# Altium PCB eta2858_evb.PcbDoc
Units mm, origin at the board's own origin, x right, y up, seen from the top; angles counter-clockwise.
Board outline 49.5 x 36.8 mm, 2 copper layers (Top Layer, Bottom Layer); 26 components, 11 nets, 65 pads, 286 vias.
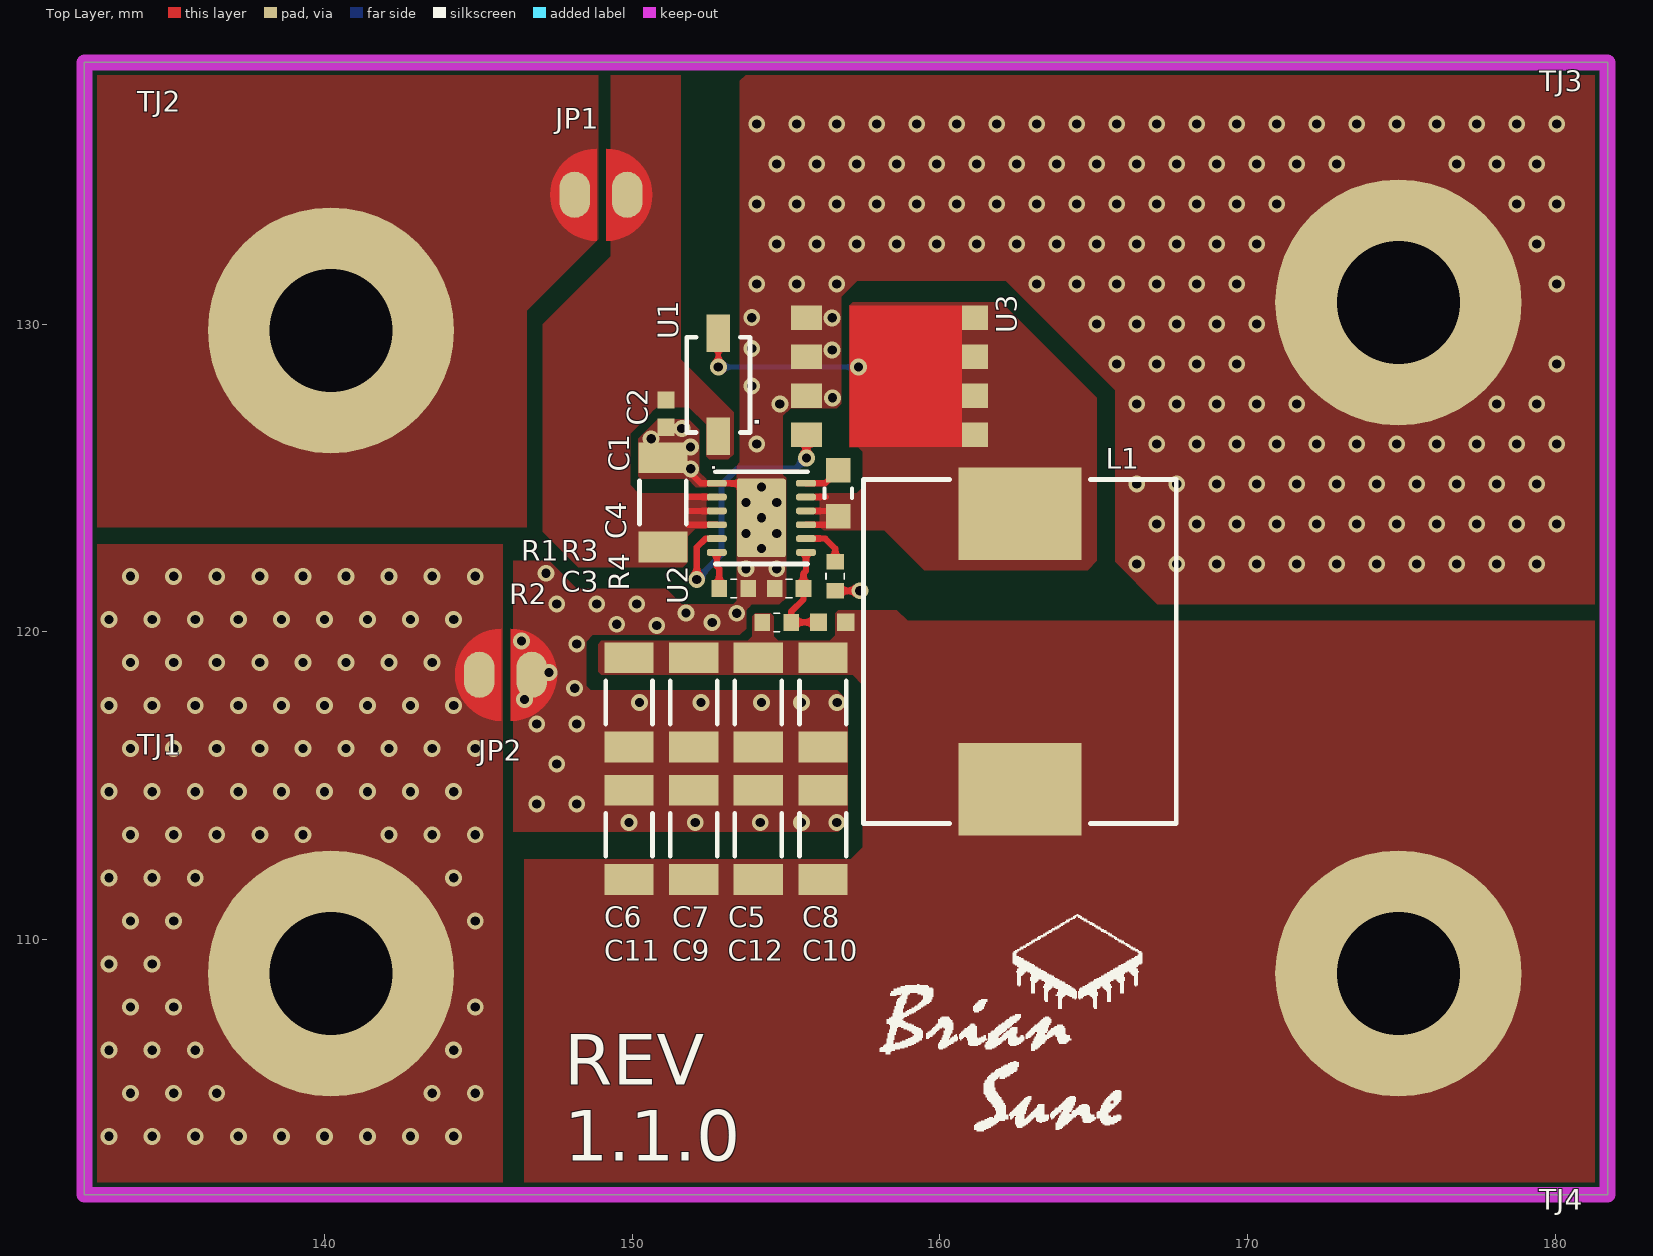
[diagram p0: Top Layer view]
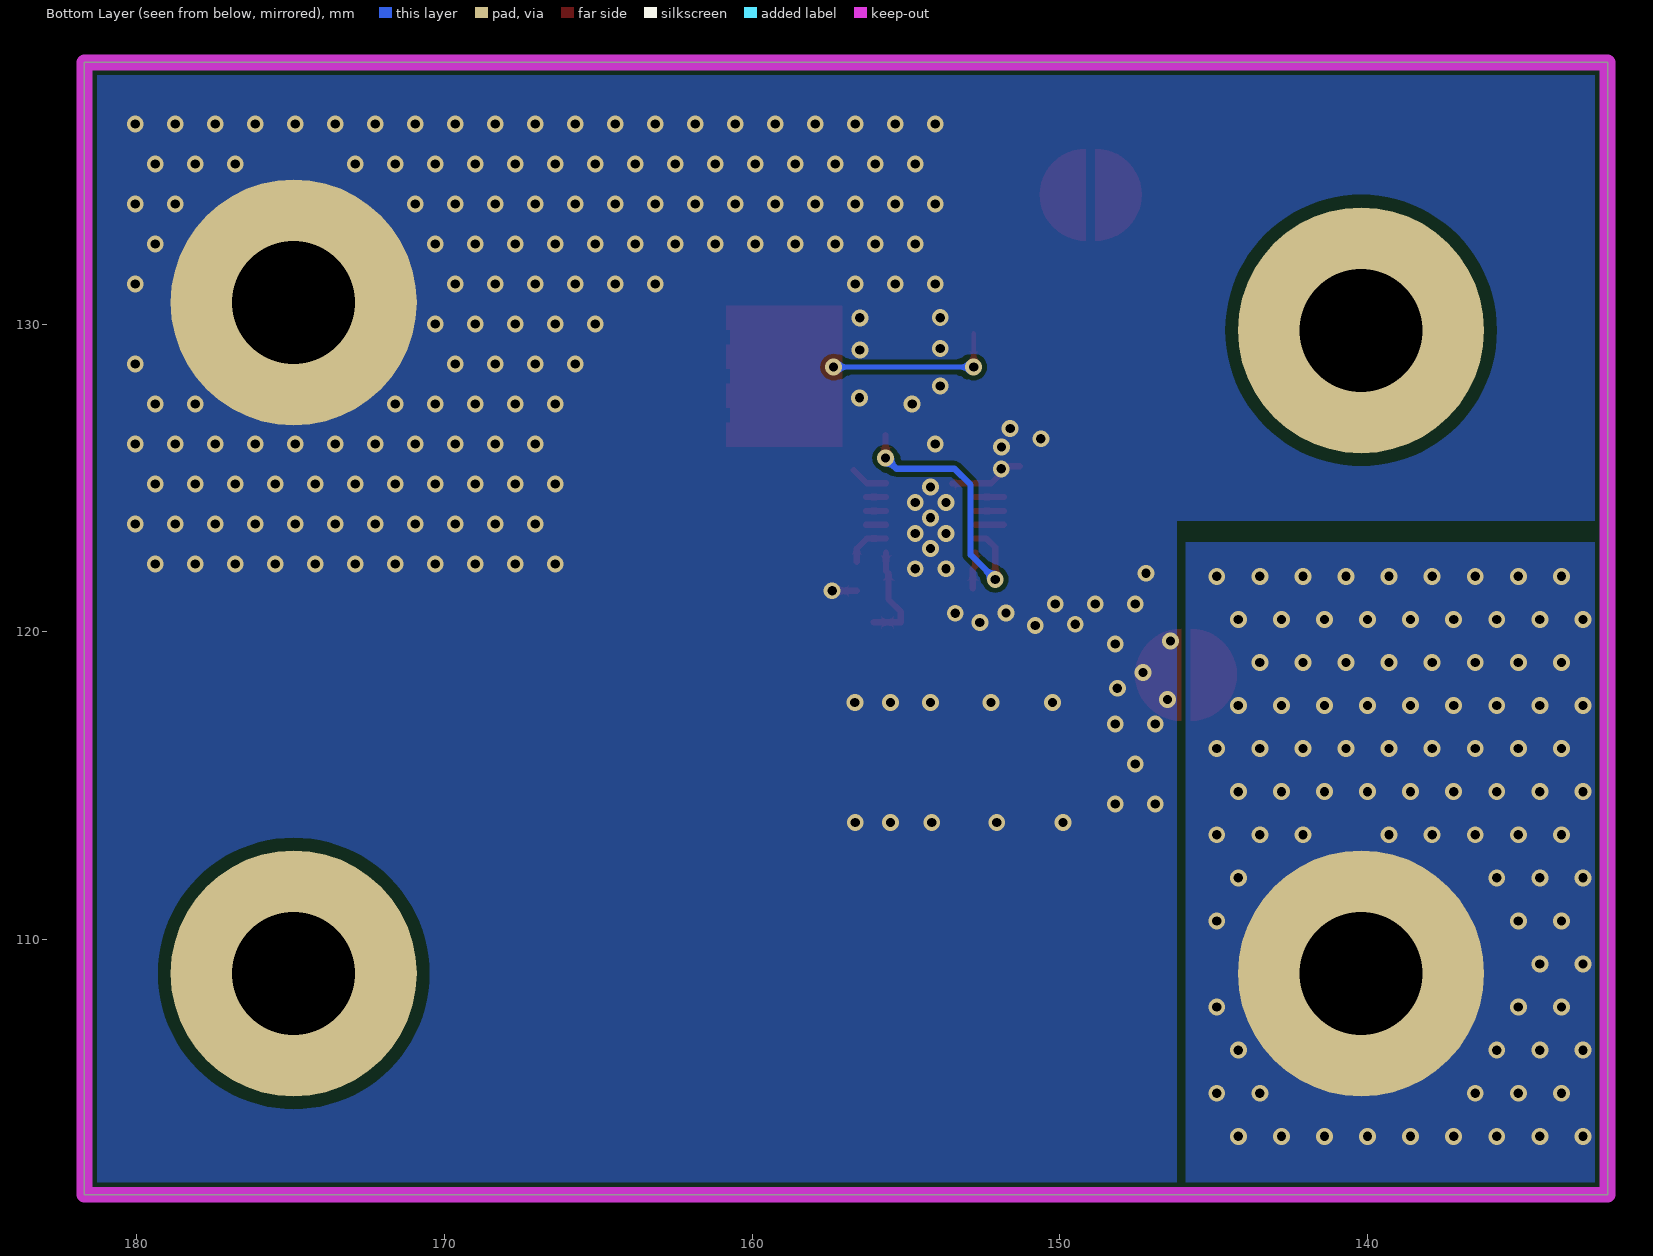
[diagram p1: Bottom Layer view, seen from below]
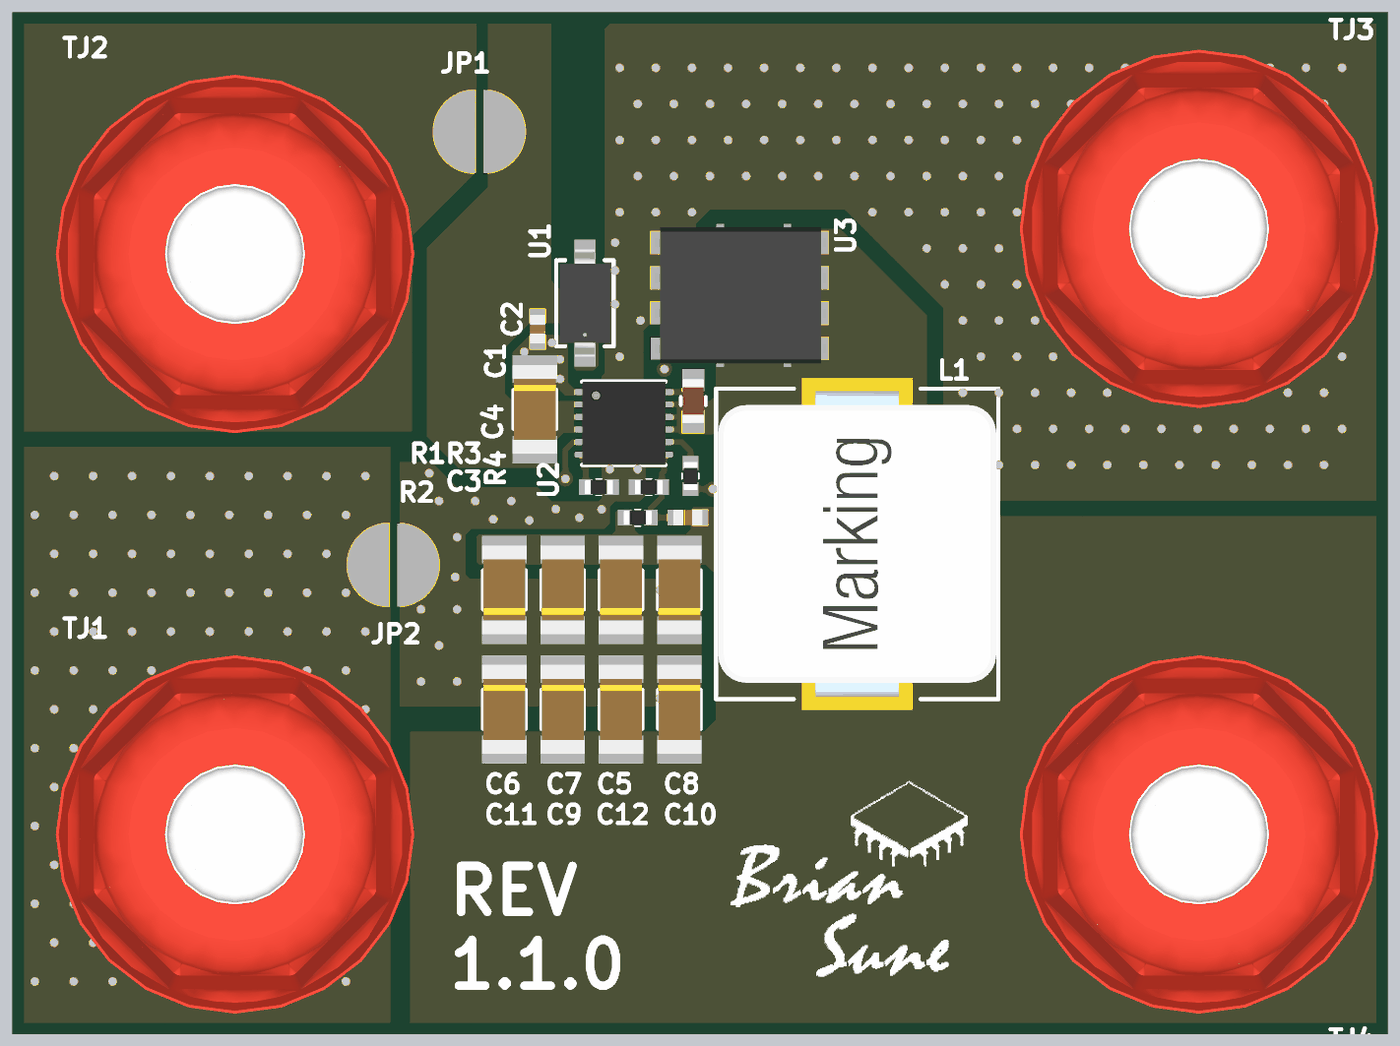
[diagram p2: 3D render of the assembled board from above, using the file's embedded part models]

## Layer stack, top to bottom
Top Solder: solder mask 0.0102, Solder Resist, Dk 3.5
Top Layer: signal copper 0.0356
Dielectric 1: dielectric 0.32, FR-4, Dk 4.8
Bottom Layer: signal copper 0.0356
Bottom Solder: solder mask 0.0102, Solder Resist, Dk 3.5

## Board outline
132.2,101.7 181.7,101.7 181.7,138.5 132.2,138.5

## Design rules (kind name [scope] priority, off if disabled: settings)
Clearance [All] p1: gap=0.152 ignorepadtopadclearanceinfootprint=FALSE except(0: Arc-Hole Track-Hole SMDPad-Hole THPad-Hole Via-Hole Fill-Hole Poly-Hole Region-Hole Text-Hole; 0.203: SMDPad-Poly SMDPad-Region THPad-Region Poly-Region; 0.406: THPad-Poly)
ComponentClearance [All] p1: gap=0.5 collisioncheckmode=3 verticalgap=0.254 showdistances=FALSE
DiffPairsRouting [All] p1: maxlimit=0.254 minlimit=0.152 mostfreqgap=0.203 toplayer_minwidth=0.152 toplayer_maxwidth=0.381 toplayer_prefwidth=0.203 bottomlayer_minwidth=0.152 bottomlayer_maxwidth=0.381 bottomlayer_prefwidth=0.203 maxuncoupledlength=12.7
Height [All] p1: minheight=0 maxheight=40 prefheight=12.7
HoleSize [All] p1: absolutevalues=TRUE maxlimit=6 minlimit=0.025 maxpercent=80.000 minpercent=20.000
HoleToHoleClearance [All] p1: gap=0.076 allowstackedmicrovias=TRUE
MinimumSolderMaskSliver [All] p1: minsoldermaskwidth=0.025
PolygonConnect [All] p1: connectstyle=Direct reliefconductorwidth=0.305 reliefentries=4 polygonreliefangle="90 Angle" airgapwidth=0.203
RoutingVias [All] p1: holewidth=0.4 width=0.6 viastyle="Through Hole" minholewidth=0.3 minwidth=0.5 maxholewidth=2.8 maxwidth=3
SilkToSilkClearance [All] p1: silktosilkclearance=0.076
SilkToSolderMaskClearance [IsPad] p1: minsilkscreentomaskgap=0.025 clearancetoexposedcopper=TRUE
SolderMaskExpansion [All] p1: expansion=0.025
Width [All] p1: maxlimit=1.016 minlimit=0.152 preferedwidth=0.254
22 further rules are at their usual default settings.

## Components (designator, comment, footprint, x,y, rotation, side; value= is the part's Value field where it differs from the comment)
C1 "10uF" CAP_CL31_SAM 151,124.2 r270 top
C2 "100nF" CAP_CC0402_YAG 151.1,127.09 r90 top
C3 "100pF" CAP_CC0402_YAG 156.5,120.305 r0 top
C4 "1uF" *CAPC1608X90 156.7,124.5 r90 top
C5 "10uF" CAP_CL31_SAM 154.1,113.4 r270 top
C6 "10uF" CAP_CL31_SAM 149.9,113.4 r270 top
C7 "10uF" CAP_CL31_SAM 152,113.4 r270 top
C8 "10uF" CAP_CL31_SAM 156.2,113.4 r270 top
C9 "10uF" CAP_CL31_SAM 152,117.7 r90 top
C10 "10uF" CAP_CL31_SAM 156.2,117.7 r90 top
C11 "10uF" CAP_CL31_SAM 149.9,117.7 r90 top
C12 "10uF" CAP_CL31_SAM 154.1,117.7 r90 top
JP1 "J?" JP 149,134.2 r0 top
JP2 "J?" JP 145.9,118.6 r0 top
L1 "4.7uH" IND_SRP1040VA-1R5M_BRN 162.6,119.356 r90 top
R1 "30k" 0402_PAN 153.3,121.4 r180 top
R2 "220k" 0402_PAN 154.7,120.3 r180 top
R3 "30k" 0402_PAN 155.1,121.4 r0 top
R4 "30k" 0402_PAN 156.6,121.8 r90 top
TJ1 "73098-0" 73098 140.208,108.892 r0 top
TJ2 "73098-0" 73098 140.208,129.794 r0 top
TJ3 "73098-0" 73098 174.9,130.7 r0 top
TJ4 "73098-0" 73098 174.9,108.892 r0 top
U1 "SS14FL" SOD-123_ONS 152.8,128.021 r90 top
U2 "ETA2858D3M" DFN3x3-12 154.2,123.7 r270 top
U3 "NMOS" SMT_009LCG-7_DIO 158.4,128.3 r0 top

## Footprints (in the part's own frame and the unit in brackets; to place one, negate y for a bottom-side part, rotate by r counter-clockwise, add the part's x,y. Pads: shape width x height; smd on the part's side, far side on the other; paste and mask are expansions set on the pad)
0402_PAN [mil]
  rect 20x22 smd paste+0 mask+0: 1(-18.5,0) 2(18.5,0)
  silkscreen extent -4,-12 4,12, body extent -20,-10 20,10, height 14
73098 [mm]
  round 8 hole 4: T1(0,0)
  body extent -6.45,-6.45 6.45,6.45, height 29.89
*CAPC1608X90 [mm]
  rect 0.8x0.8 smd: 1(-0.75,0) 2(0.75,0)
  silkscreen extent -0.15,-0.45 0.15,0.45, body extent -0.8,-0.4 0.8,0.4, height 0.6
CAP_CC0402_YAG [mil]
  rect 22x22 smd: 1(-17.5,0) 2(17.5,0)
  body extent -21,-11 21,11, height 22
CAP_CL31_SAM [mm]
  rect 1x1.6 smd paste+0 mask+0: 1(-1.45,0) 2(1.45,0)
  silkscreen extent -0.7,-0.76 0.7,0.76, body extent -1.6,-0.8 1.6,0.8, height 1
DFN3x3-12 [mm]
  rrect70% 0.22x0.65 smd: 1(-1.125,-1.45) 2(-0.675,-1.45) 3(-0.225,-1.45) 4(0.225,-1.45) 5(0.675,-1.45) 6(1.125,-1.45) 7(1.125,1.45) 8(0.675,1.45) 9(0.225,1.45) 10(-0.225,1.45) 11(-0.675,1.45) 12(-1.125,1.45)
  rrect10% 2.55x1.6 smd: 1(0,0)
  silkscreen extent -1.5,-1.5 1.5,1.5, body extent -1.5,-1.5 1.5,1.5, height 0.76
IND_SRP1040VA-1R5M_BRN [mm]
  rect 3x4 smd paste-1.753 mask+0: 1(-4.475,0) 2(4.475,0)
  silkscreen extent -5.59,-5.08 5.59,5.08, body extent -5.5,-5 5.5,5, height 3.85
JP [mm]
  oval 1x1.5 smd: 1(-0.868,0) 2(0.838,0)
  Top Layer region: -0.152,-1.5 -0.152,1.5 -0.158,1.5 -0.732,1.386 -1.218,1.061 -1.543,0.574 -1.658,0 -1.658,0 -1.543,-0.574 -1.218,-1.061 -0.732,-1.386 -0.158,-1.5 -0.158,-1.5
  Top Layer region: 0.152,1.5 0.152,-1.5 0.158,-1.5 0.732,-1.386 1.218,-1.061 1.543,-0.574 1.658,0 1.658,0 1.543,0.574 1.218,1.061 0.732,1.386 0.158,1.5 0.158,1.5
SMT_009LCG-7_DIO [mm]
  rect 1x0.8 smd: 1(-2.738,1.905) 2(-2.738,0.635) 3(-2.738,-0.635) 4(-2.738,-1.905)
  rect 0.85x0.8 smd: 5(2.738,-1.905) 6(2.738,-0.635) 7(2.738,0.635) 8(2.738,1.905)
  Top Layer region: 2.2,-2.3 2.454,-2.3 2.454,-1.5 2.2,-1.5
  Top Layer region: 2.2,-1.035 2.454,-1.035 2.454,-0.235 2.2,-0.235
  Top Layer region: 2.2,0.235 2.454,0.235 2.454,1.035 2.2,1.035
  Top Layer region: -1.338,-2.3 2.312,-2.3 2.312,2.3 -1.338,2.3
  Top Layer region: 2.454,2.3 2.2,2.3 2.2,1.5 2.454,1.5
  Top Layer region: -0.564,1.166 -0.564,1.166 -0.564,1.166 -0.564,1.166 -0.564,1.166 -0.564,1.166 -0.564,1.166 -0.564,1.166
  Top Layer region: -0.564,-1.166 -0.564,-1.166 -0.564,-1.166 -0.564,-1.166 -0.564,-1.166 -0.564,-1.166 -0.564,-1.166 -0.564,-1.166
  body extent -3.07,-2.57 3.08,2.58, height 1
SOD-123_ONS [mil]
  rect 48x30 smd paste+0 mask+0: 1(-66,0) 2(66,0)
  silkscreen extent -61,-41 61,41, body extent -76,-36 76,36, height 53

## Part data
C1 C5 C6 C7 C8 C9 C10 C11 C12: library part CL31B106KBHNNNE, "CL31B106KBHNNNE / Multilayer Ceramic Capacitors MLCC - SMD/SMT 10uF+/-10% 50V X7R 3 1206", Mfr.="Samsung Electro-Mechanics", ComponentLink1Description=mouser, ComponentLink1URL=https://www.mouser.hk/ProductDetail/Samsung-Electro-Mechanics/CL31B106KBHNNNE?qs=T0XSgvH75d4ZN8WrMi8xmQ%3D%3D, Mfr. No=CL31B106KBHNNNE
C2: library part GCM155R71H104ME02J, "GCM155R71H104ME02J / Multilayer Ceramic Capacitors MLCC - SMD/SMT", Mfr.="Murata Electronics", ComponentLink1Description=mouser, ComponentLink1URL=https://www.mouser.hk/ProductDetail/Murata-Electronics/GCM155R71H104ME02J?qs=QzBtWTOodeX25ZLBhHkqFQ%3D%3D, Mfr. No=GCM155R71H104ME02J
C3: library part GCM1555C1H101JA16D, "GCM1555C1H101JA16D / Multilayer Ceramic Capacitors MLCC - SMD/SMT 100PF 50V 5% 0402", Mfr.="Murata Electronics", ComponentLink1Description=mouser, ComponentLink1URL=https://www.mouser.hk/ProductDetail/Murata-Electronics/GCM1555C1H101JA16D?qs=QDXoN8f0aYJDrHLGHfBgVg%3D%3D, Mfr. No=GCM1555C1H101JA16D
C4: library part 0603F105M500NT, "1uF(105) ±20% 50V X7R 0603F105M500NT", Package="0603 Kemet", ComponentLink1Description=Taobao, ComponentLink1URL=https://item.taobao.com/item.htm?spm=a1z09.2.0.0.1e6b2e8dpr7A02&id=560896377413&_u=o10quk0k0a55, MF=KEMET, MP=C0603C104Z3VACTU, Price=None
JP1 JP2: library part J
L1: library part SRP1040VA-1R5M, "SRP1040VA-1R5M", Mfr_Name="Bourns Electronics", ComponentLink1Description=mouser, ComponentLink1URL=https://www.mouser.hk/ProductDetail/Bel-Signal-Transformer/SCIHP1040-4R7M?qs=sGAEpiMZZMv126LJFLh8y3HRMrH70VMAgNeqJK98o1Y%3D, Manufacturer_Part_Number=SRP1040VA-1R5M
R1 R3 R4: library part RT0402FRE0730KL, "RT0402FRE0730KL / Thin Film Resistors - SMD 1/16W 30K ohm 1% 50ppm", Mfr.=YAGEO, ComponentLink1Description=mouser, ComponentLink1URL=https://www.mouser.hk/ProductDetail/YAGEO/RT0402FRE0730KL?qs=BXCcY9r%252B08BWOl0x0896sA%3D%3D, Mfr. No=RT0402FRE0730KL
R2: library part RT0402FRE07220KL, "RT0402FRE07220KL / Thin Film Resistors - SMD 220K ohm 1% 50ppm High Stability", Mfr.=YAGEO, ComponentLink1Description=mouser, ComponentLink1URL=https://www.mouser.hk/ProductDetail/YAGEO/RT0402FRE07220KL?qs=gY0y7AQI9SMoL0bNFq1hfg%3D%3D, Mfr. No=RT0402FRE07220KL
TJ1 TJ2 TJ3 TJ4: Manufacturer="Pomona Electronics", Manufacturer Product Number=73098-0, Supplier=Description
U1: Mfr_Name=onsemi, Copyright="Copyright (C) 2022 Ultra Librarian. All rights reserved.", Manufacturer_Part_Number=SS14FL, RefDes=RefDes, Type=DEV
U3: library part DMT10H009LCG-7, "DMT10H009LCG-7", Mfr_Name="Diodes Inc", Copyright="Copyright (C) 2022 Ultra Librarian. All rights reserved.", Manufacturer_Part_Number=DMT10H009LCG-7, RefDes=RefDes, Type=DEV

## Via types
v1: diameter 0.55, hole 0.3, Top Layer to Bottom Layer, tented both sides, 286 vias

## Nets (pads, with @x,y where several pads share a name; then routed paths per layer and width w, separated by ;. In a path a pad name is that pad's centre, name@x,y a point inside that pad or via, vN(x,y) a via of type N, cw(c..) or ccw(c..) an arc to the next point about the centre after c; other vN are vias at no path point)
+5V: C3.2 C5.2 C6.2 C7.2 C8.2 C9.2 C10.2 C11.2 C12.2 L1.1 R2.2 TJ4.T1
+32V_13V: JP1.1 TJ2.T1
GND: JP2.1 TJ1.T1
  other v1: 133,103.6 134.4,103.6 135.8,103.6 137.2,103.6 138.6,103.6 140,103.6 141.4,103.6 142.8,103.6 144.2,103.6 133.7,105 135.1,105 136.5,105 143.5,105 144.9,105 133,106.4 134.4,106.4 135.8,106.4 144.2,106.4 133.7,107.8 135.1,107.8 144.9,107.8 133,109.2 134.4,109.2 133.7,110.6 135.1,110.6 144.9,110.6 133,112 134.4,112 135.8,112 144.2,112 133.7,113.4 135.1,113.4 136.5,113.4 137.9,113.4 139.3,113.4 142.1,113.4 143.5,113.4 144.9,113.4 133,114.8 134.4,114.8 135.8,114.8 137.2,114.8 138.6,114.8 140,114.8 141.4,114.8 142.8,114.8 144.2,114.8 133.7,116.2 135.1,116.2 136.5,116.2 137.9,116.2 139.3,116.2 140.7,116.2 142.1,116.2 143.5,116.2 144.9,116.2 133,117.6 134.4,117.6 135.8,117.6 137.2,117.6 138.6,117.6 140,117.6 141.4,117.6 142.8,117.6 144.2,117.6 133.7,119 135.1,119 136.5,119 137.9,119 139.3,119 140.7,119 142.1,119 143.5,119 133,120.4 134.4,120.4 135.8,120.4 137.2,120.4 138.6,120.4 140,120.4 141.4,120.4 142.8,120.4 144.2,120.4 133.7,121.8 135.1,121.8 136.5,121.8 137.9,121.8 139.3,121.8 140.7,121.8 142.1,121.8 143.5,121.8 144.9,121.8
NetC1_1: C1.1 C2.1 C5.1 C6.1 C7.1 C8.1 C9.1 C10.1 C11.1 C12.1 JP2.2 R1.1 R3.1 R4.1 TJ3.T1 U2.1 U3.1 U3.2 U3.3 | length 3.2
  Top Layer w0.203: C1.1@151.3,125.375 151.679,125.375 152.229,124.825 152.75,124.825 152.758,124.817 U2.1@153.502,124.817 ; R4.1 v1(157.4,121.33)
  other v1: 149.9,113.8 152.05,113.8 154.164,113.8 155.5,113.8 156.65,113.8 146.9,114.4 148.2,114.4 147.55,115.7 146.9,117 148.2,117 150.24,117.7 152.234,117.7 154.2,117.7 155.5,117.7 156.662,117.7 146.5,117.8 148.132,118.162 147.3,118.674 148.2,119.6 146.4,119.7 150.8,120.2 149.5,120.242 152.6,120.3 151.75,120.61 153.4,120.6 147.55,120.9 148.85,120.9 150.15,120.9 147.2,121.9 153.7,122.045 154.7,122.045 166.4,122.2 167.7,122.2 169,122.2 170.3,122.2 171.6,122.2 172.9,122.2 174.2,122.2 175.5,122.2 176.8,122.2 178.1,122.2 179.4,122.2 154.2,122.7 153.7,123.19 154.7,123.19 167.05,123.5 168.35,123.5 169.65,123.5 170.95,123.5 172.25,123.5 173.55,123.5 174.85,123.5 176.15,123.5 177.45,123.5 178.75,123.5 180.05,123.5 154.2,123.7 153.7,124.2 154.7,124.2 154.2,124.7 166.4,124.8 167.7,124.8 169,124.8 170.3,124.8 171.6,124.8 172.9,124.8 174.2,124.8 175.5,124.8 176.8,124.8 178.1,124.8 179.4,124.8 151.905,125.294 151.9,126 154.05,126.1 167.05,126.1 168.35,126.1 169.65,126.1 170.95,126.1 172.25,126.1 173.55,126.1 174.85,126.1 176.15,126.1 177.45,126.1 178.75,126.1 180.05,126.1 150.617,126.271 151.614,126.6 154.8,127.4 166.4,127.4 167.7,127.4 169,127.4 170.3,127.4 171.6,127.4 178.1,127.4 179.4,127.4 156.508,127.6 153.886,127.989 165.75,128.7 167.05,128.7 168.35,128.7 169.65,128.7 180.05,128.7 156.5,129.151 153.886,129.2 165.1,130 166.4,130 167.7,130 169,130 170.3,130 153.886,130.205 156.5,130.2 154.05,131.3 155.35,131.3 156.65,131.3 163.15,131.3 164.45,131.3 165.75,131.3 167.05,131.3 168.35,131.3 169.65,131.3 180.05,131.3 154.7,132.6 156,132.6 157.3,132.6 158.6,132.6 159.9,132.6 161.2,132.6 162.5,132.6 163.8,132.6 165.1,132.6 166.4,132.6 167.7,132.6 169,132.6 170.3,132.6 179.4,132.6 154.05,133.9 155.35,133.9 156.65,133.9 157.95,133.9 159.25,133.9 160.55,133.9 161.85,133.9 163.15,133.9 164.45,133.9 165.75,133.9 167.05,133.9 168.35,133.9 169.65,133.9 170.95,133.9 178.75,133.9 180.05,133.9 154.7,135.2 156,135.2 157.3,135.2 158.6,135.2 159.9,135.2 161.2,135.2 162.5,135.2 163.8,135.2 165.1,135.2 166.4,135.2 167.7,135.2 169,135.2 170.3,135.2 171.6,135.2 172.9,135.2 176.8,135.2 178.1,135.2 179.4,135.2 154.05,136.5 155.35,136.5 156.65,136.5 157.95,136.5 159.25,136.5 160.55,136.5 161.85,136.5 163.15,136.5 164.45,136.5 165.75,136.5 167.05,136.5 168.35,136.5 169.65,136.5 170.95,136.5 172.25,136.5 173.55,136.5 174.85,136.5 176.15,136.5 177.45,136.5 178.75,136.5 180.05,136.5
NetC1_2: C1.2 C2.2 JP1.2 U1.1 U2.2 U2.3 U2.4 | length 2.8
  Top Layer w0.203: 151.826,123.475 U2.4 ; 151.826,123.925 U2.3 ; 151.826,124.375 U2.2
NetC3_1: C3.1 R2.1 R3.2 U2.7 | length 3.4
  Top Layer w0.203: U2.7 155.65,121.98 155.57,121.9 R3.2 155.57,121.055 155.17,120.655 R2.1 155.175,120.305 C3.1
NetC4_1: C4.1 L1.2 U1.2 U2.9 U2.10 U2.11 U3.5 U3.6 U3.7 U3.8 | length 7.6
  Top Layer w0.152: v1(152.8,128.6) U1.2
  Top Layer w0.203: U2.9 156.3,123.475 ; U2.10 156.3,123.925 ; U2.11 156.3,124.375
  Bottom Layer w0.152: v1(152.8,128.6) v1(157.353,128.6)
NetC4_2: C4.2 U2.12 | length 1.2
  Top Layer w0.203: U2.12 156.275,124.825 C4.2
NetR1_2: R1.2 U2.6 | length 1.2
  Top Layer w0.203: U2.6 152.75,122.125 152.83,122.045 R1.2
NetR4_2: R4.2 U2.8 | length 1.5
  Top Layer w0.203: U2.8 156.275,123.025 156.6,122.7 R4.2
NetU2_5: U2.5 U3.4 | length 9.1
  Top Layer w0.203: v1(152.1,121.7) 152.1,122.741 152.384,123.025 U2.5 ; v1(155.663,125.647) U3.4
  Bottom Layer w0.203: v1(152.1,121.7) 152.9,122.5 152.9,124.769 153.424,125.293 155.309,125.293 v1(155.663,125.647)

## Polygon pours and split planes (outlines as drawn)
NetC4_1 on Top Layer "NETC4_1_L01_P024" (solid, remove dead copper, pour order 24): 157.062,126 157.353,126 157.5,125.853 157.5,125.562 157.5,124.7 157.3,124.5 156.1,124.5 156.1,123.4 156.2,123.3 158.2,123.3 159.5,122 164.8,122 165.1,122.3 165.1,127.6 162,130.7 157.162,130.7 157.063,130.6
NetC1_1 on Top Layer (solid, remove dead copper, pour order 32): 153.5,137.9 154.1,138.5 181.7,138.5 181.7,120.9 167.07,120.9 165.7,122.27 165.7,127.85 162.15,131.4 157.312,131.4 156.8,130.887 156.8,127.415 156.65,127.265 155.148,127.265 154.9,127.017 154.9,125.1 155,125 155,121.1 154.786,120.886 154.443,120.886 153.886,120.886 153.7,120.7 153.7,120.1 153.5,119.9 148.724,119.9 148.5,119.676 148.5,118.248 148.648,118.1 156.662,118.1 157,117.762 157,113.8 156.7,113.5 146.132,113.5 146.132,122.3 147.305,122.3 148.205,121.4 151.1,121.4 151.614,120.886 153.286,120.886 153.4,121 153.4,125.4 153.5,125.5
+5V on Top Layer "+5V_L01_P028" (solid, remove dead copper, pour order 28): 156.7,120.7 156.6,120.6 156.6,119.884 156.416,119.7 154.747,119.7 154.6,119.847 154.6,120.5 154.5,120.6 153.998,120.6 153.9,120.502 153.9,119.847 153.753,119.7 149,119.7 148.895,119.595 148.895,118.7 148.995,118.6 157.162,118.6 157.5,118.262 157.5,113 157.1,112.6 146.5,112.6 146.5,101.9 146.7,101.7 181.7,101.7 181.7,120.35 158.95,120.35 158.6,120.7
NetC1_2 on Top Layer "NETC1_2_L01_P020" (solid, remove dead copper, pour order 20): 152.4,123.35 152.05,123.35 151.8,123.1 151.8,122.2 151.7,122.1 148.25,122.1 147.1,123.25 147.1,130 149.3,132.2 149.3,138.5 151.583,138.5 151.583,128.848 153.3,127.13 153.3,125.77 153.13,125.6 152.5,125.6 152.4,125.7 152.4,126.746 151.846,127.3 150.8,127.3 149.932,126.432 149.932,124.768 150.2,124.5 152.4,124.5
NetC1_1 on Top Layer "NETC1_1_L01_P022" (solid, remove dead copper, pour order 22): 152.4,124.7 152.068,124.7 151.8,124.968 150.28,124.968 150.2,125.048 150.2,126.271 150.829,126.9 151.846,126.9 152.186,126.56 152.186,125.182 152.4,124.968
NetC1_1 on Top Layer "NETC1_1_L01_P002" (solid, remove dead copper, pour order 2): 214.134,118.1 214.134,125.9 214.834,126.6 228.034,126.6 228.034,108.3 196.034,108.3 196.034,125.509 196.356,125.831 196.903,125.831 197.134,125.6 197.134,123.664 197.978,122.82 197.978,121.2 199.904,119.274 201.408,119.274 201.882,119.748 201.882,120.852 201.534,121.2 199.656,121.2 198.885,121.971 198.885,129.568 198.664,129.79 196.034,129.79 196.034,130.911 196.323,131.2 199.304,131.2 199.634,130.869 199.634,130.09 199.934,129.79 200.512,129.79 200.639,129.663 200.639,128.647 200.512,128.52 200.512,125.218 201.02,124.71 201.947,124.71 202.734,125.498 202.734,126.1 202.846,126.212 203.134,126.212 203.234,126.112 203.234,125.5 202.402,124.668 202.402,119.64 202.842,119.2 206.934,119.2 207.434,119.7 207.434,126 207.634,126.2 208.734,126.2 209.234,125.7 209.234,117.766 209.7,117.3 213.334,117.3
GND on Top Layer "GND_L01_P016" (solid, remove dead copper, pour order 16): 132.1,122.85 132.1,101.7 145.8,101.7 145.8,122.85
+32V_13V on Top Layer "+32V_13V_L01_P012" (solid, remove dead copper, pour order 12): 146.572,123.4 146.572,130.425 148.895,132.747 148.895,138.59 132.1,138.499 132.1,123.4
no net on Top Layer "Top Layer-No Net" (solid, pour order 8): 149.808,123.19
NetC1_1 on Bottom Layer "NETC1_1_L02_P014" (solid, remove dead copper, pour order 14): 146.2,138.5 132.2,138.5 132.2,123.6 146.2,123.6 146.2,101.7 181.7,101.7 181.7,138.5
GND on Bottom Layer "GND_L02_P018" (solid, remove dead copper, pour order 18): 145.9,122.9 145.9,101.6 132.2,101.6 132.2,122.9

## Keep-outs
Keep-Out Layer:
  the board outline again, w0.508

## Silkscreen, mask and mechanical layers (free items; w line width, h text height)
Top Overlay:
  drawing of 11 lines, arcs and shapes, not listed
  text "REV / 1.1.0" at 147.8,102.8 h1.65